# Altium PCB LCD_Board_2.PcbDoc (part 2 of 2)
Units mm, origin at the board's own origin, x right, y up, seen from the top; angles counter-clockwise.
Board outline 96.52 x 66.04 mm, 2 copper layers (Top Layer, Bottom Layer), stack 1.569 mm thick; 78 components, 60 nets, 337 pads, 81 vias.
Unrouted connection lines stored in the file: 77.
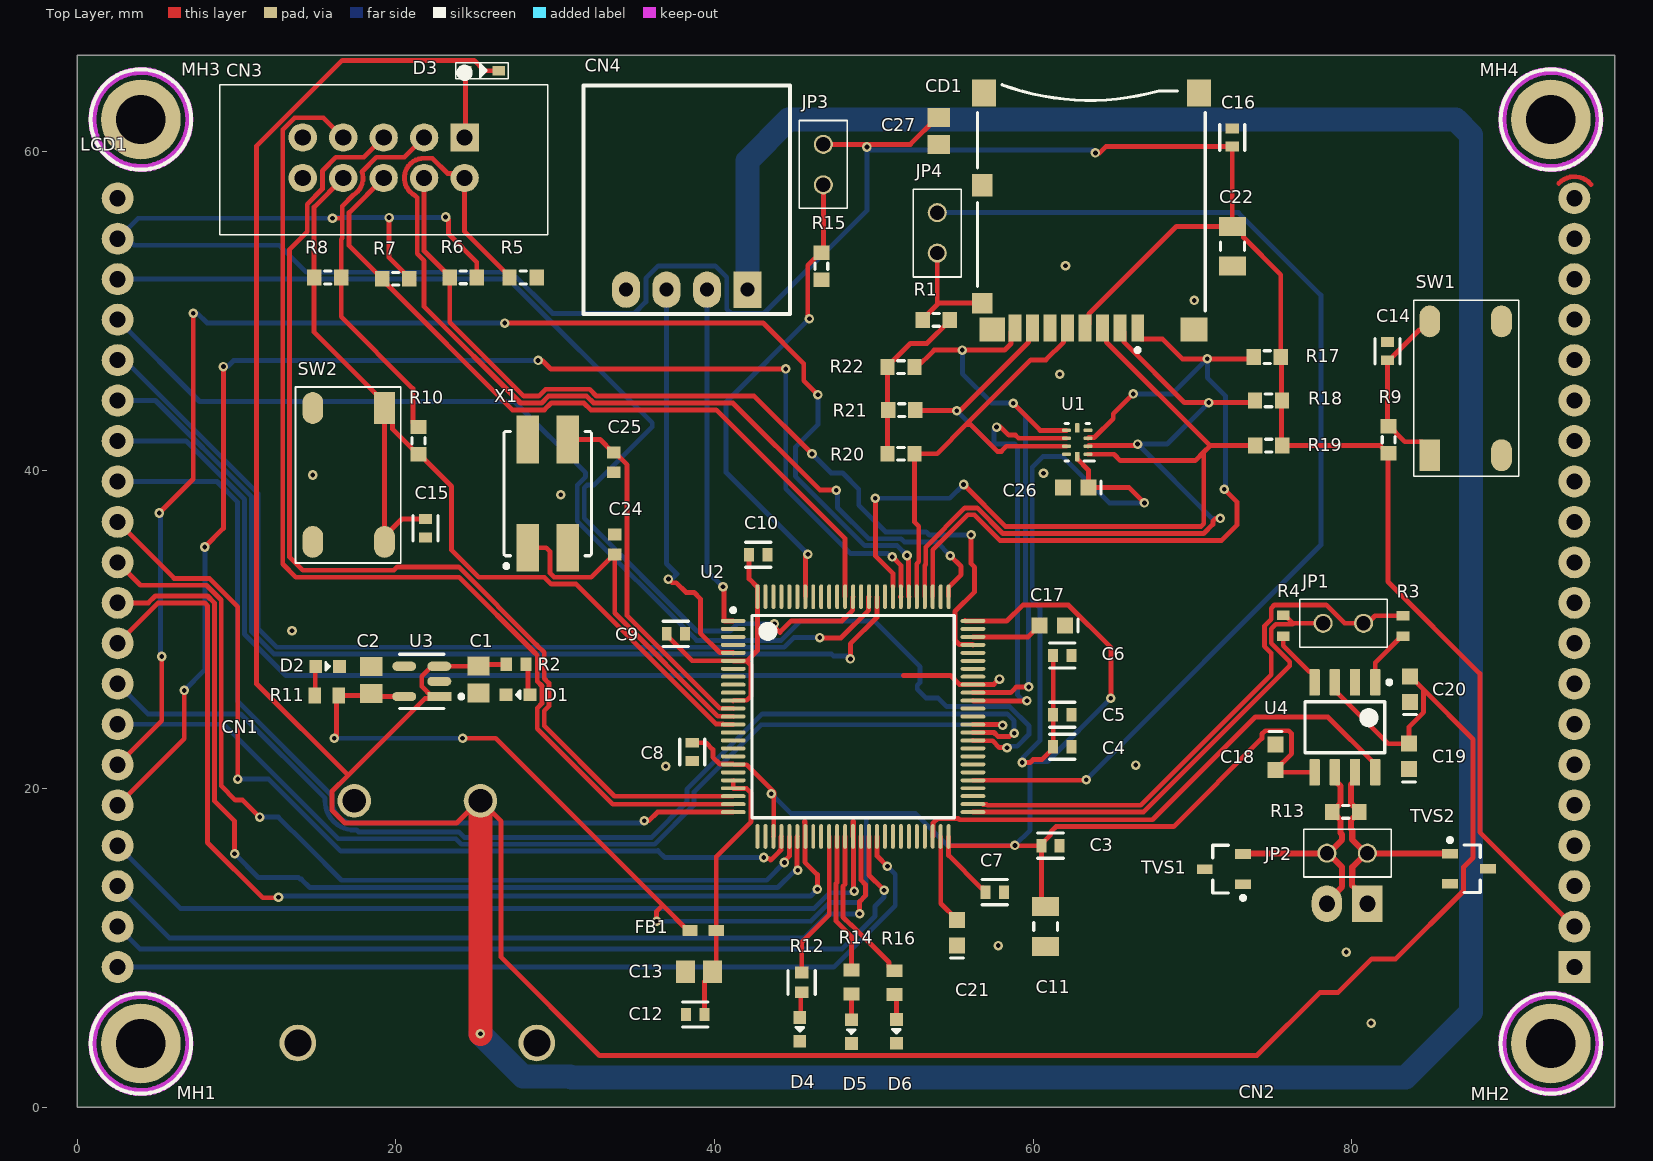
[diagram p0: Top Layer view]

## Via types
v1: diameter 0.6, hole 0.3, Top Layer to Bottom Layer, 81 vias

## Nets (pads, with @x,y where several pads share a name; then routed paths per layer and width w, separated by ;. In a path a pad name is that pad's centre, name@x,y a point inside that pad or via, vN(x,y) a via of type N, cw(c..) or ccw(c..) an arc to the next point about the centre after c; other vN are vias at no path point) (continued)
NetLCD1_24: (continued)
  Bottom Layer w0.305: LCD1.24 7.679,44.302 27.444,44.302 31.916,39.83 31.916,39.577 31.394,39.055 31.394,36.795 38.883,29.306 44.196,29.306 45.415,30.525 50.032,30.525 52.908,27.649 52.908,26.67 52.73,26.492 52.73,26.239 53.289,25.68 54.051,25.68 54.585,25.146 58.536,25.146 59.746,23.936 59.746,23.803 59.745,23.802 59.745,23.54 59.746,23.539 59.746,23.406 58.999,22.659 58.342,22.659 58.365,22.636 v1(58.365,22.572)
NetLCD1_25: LCD1.25 U2.86 | length 61.4
  Top Layer w0.305: v1(46.609,29.484) 46.629,29.464 47.945,29.464 49.682,31.201 49.682,32.026 U2.86
  Bottom Layer w0.305: LCD1.25 2.989,46.901 11.367,38.523 11.367,30.048 12.541,28.874 44.375,28.874 44.984,29.484 v1(46.609,29.484)
NetLCD1_26: LCD1.26 U2.85 | length 62.3
  Top Layer w0.305: v1(48.539,28.143) 48.539,29.083 50.205,30.748 U2.85
  Bottom Layer w0.305: LCD1.26 4.918,44.361 10.935,38.344 10.935,29.869 12.362,28.442 47.351,28.442 47.466,28.328 48.355,28.328 v1(48.539,28.143)
NetLCD1_27: LCD1.27 U2.67 | length 66.8
  Top Layer w0.305: 51.867,27.102 54.826,27.102 55.382,26.546 56.207,26.546 U2.67 56.252,26.546 57.542,26.546 v1@57.913,26.918
  Bottom Layer w0.305: LCD1.27 6.847,41.821 10.503,38.165 10.503,29.69 13.092,27.102 51.867,27.102
  other v1: 57.897,26.877
NetLCD1_28: LCD1.28 U2.25 | length 55.5
  Top Layer w0.305: v1(35.596,17.982) 35.602,17.988 35.89,17.988 36.426,18.524 U2.25
  Bottom Layer w0.305: LCD1.28 8.776,39.281 10.071,37.986 10.071,25.49 15.992,19.569 15.992,19.259 ccw(c17.394,19.238) 17.397,17.835 17.601,17.835 25.314,17.835 35.449,17.835 35.539,17.925 v1(35.596,17.982)
NetLCD1_29: LCD1.29 U2.29 | length 57.9
  Top Layer w0.305: LCD1.29 6.084,33.197 8.297,33.197 10.085,31.41 v1(10.085,20.6) ; v1(43.101,15.678) 43.158,15.621 43.41,15.621 43.531,15.5 43.902,15.871 44.182,16.151 44.182,16.976 U2.29
  Bottom Layer w0.305: v1(10.085,20.6) 12.024,20.6 16.547,16.077 36.473,16.077 ; 36.453,16.106 36.477,16.082 36.881,15.678 v1(43.101,15.678)
NetLCD1_30: LCD1.30 U2.30 | length 59.2
  Top Layer w0.305: LCD1.30 3.976,32.765 8.118,32.765 9.043,31.84 9.043,20.169 9.929,19.283 10.397,19.283 v1(11.468,18.212) ; v1(44.393,15.364) 44.393,15.443 44.705,15.755 U2.30
  Bottom Layer w0.305: v1(11.468,18.212) 12.634,18.212 14.412,16.434 16.594,14.252 39.892,14.252 43.282,14.252 v1(44.393,15.364)
NetLCD1_31: LCD1.31 U2.31 | length 61.3
  Top Layer w0.305: LCD1.31 4.469,31.661 4.901,32.093 8.179,32.093 8.611,31.661 8.611,19.227 9.881,17.958 v1(9.881,15.913) ; v1@45.182,14.904 45.182,16.976 U2.31
  Bottom Layer w0.305: v1(9.881,15.913) 11.38,14.413 13.906,14.413 13.997,14.322 14.071,14.322 14.601,13.792 43.971,13.792 45.069,14.889 v1@45.081,14.889
  other v1: 45.236,14.877
NetLCD1_32: LCD1.32 U2.32 | length 67.1
  Top Layer w0.305: LCD1.32 5.08,31.661 8,31.661 8.179,31.482 8.179,16.616 11.648,13.147 12.601,13.147 v1(12.639,13.186) ; U2.32 45.705,17.926 45.657,17.926 45.657,17.872 45.682,17.846 45.682,15.389 46.463,14.608 v1(46.463,13.686)
  Bottom Layer w0.305: v1(12.639,13.186) 12.695,13.242 12.904,13.242 12.925,13.263 46.04,13.263 v1(46.463,13.686)
NetLCD1_33: LCD1.33 U2.61 | length 68.1
  Top Layer w0.305: U2.61 57.549,23.524 57.794,23.279 58.539,23.279 58.778,23.518 v1@58.827,23.518
  Bottom Layer w0.305: LCD1.33 4.338,24.783 4.427,24.694 10.257,24.694 10.346,24.604 15.56,19.39 15.56,19.265 cw(c15.255,19.264) 15.56,19.26 ccw(c17.394,19.238) 17.417,17.403 cw(c17.421,17.098) 17.422,17.403 17.547,17.403 17.665,17.285 23.952,17.285 24.297,16.941 36.055,16.941 38.277,19.163 38.277,19.965 43.006,24.694 58.377,24.694 58.815,24.256 v1(58.815,23.475)
NetLCD1_34: LCD1.34 U2.62 | length 64.1
  Top Layer w0.305: U2.62 58.048,24.024 v1(58.086,23.985)
  Bottom Layer w0.305: LCD1.34 9.193,24.041 16.381,16.853 23.773,16.853 24.118,16.509 36.245,16.509 38.709,18.973 38.709,19.786 42.93,24.007 58.064,24.007 v1(58.086,23.985)
NetLCD1_35: LCD1.35 U2.81 | length 89.8
  Top Layer w0.305: LCD1.35 5.309,24.27 v1(5.309,28.296) ; v1(5.156,37.3) 7.29,39.433 v1(7.29,49.835) ; v1(26.835,49.225) 43.065,49.225 45.608,46.682 45.608,45.616 v1(46.495,44.729) ; v1(52.09,34.635) 52.09,34.558 52.182,34.465 52.182,32.071 U2.81
  Bottom Layer w0.305: v1(5.156,37.3) 5.232,37.224 5.232,28.372 v1(5.309,28.296) ; v1(7.29,49.835) 7.551,49.835 8.161,49.225 v1(26.835,49.225) ; v1(46.495,44.729) 46.495,42.85 45.085,41.44 45.085,39.614 49.446,35.253 51.471,35.253 v1(52.09,34.635)
NetLCD1_36: LCD1.36 U2.82 | length 84.1
  Top Layer w0.305: LCD1.36 6.718,23.139 v1(6.718,26.162) ; v1(8.014,35.166) 9.182,36.335 v1(9.182,46.495) ; v1(28.931,46.876) 29.192,46.876 29.725,46.342 v1(44.475,46.342) ; v1(51.164,34.546) 51.179,34.546 51.705,34.02 U2.82@51.705,32.671 ; U2.82@51.682,32.026 U2.82
  Bottom Layer w0.305: v1(6.718,26.162) 8.014,27.457 v1(8.014,35.166) ; v1(9.182,46.495) 9.443,46.495 9.824,46.876 v1(28.931,46.876) ; v1(44.475,46.342) 44.475,38.826 48.536,34.766 50.864,34.766 51.085,34.546 v1(51.164,34.546)
NetLCD1_37: LCD1.37 U2.38 | length 53.6
  Top Layer w0.305: U2.38 48.704,17.926 48.727,17.926 48.727,16.999 48.727,13.616 v1(48.774,13.569)
  Bottom Layer w0.305: LCD1.37 6.482,12.479 46.256,12.479 47.242,13.465 48.671,13.465 v1(48.774,13.569)
NetLCD1_38: LCD1.38 U2.39 | length 53.6
  Top Layer w0.305: v1@49.082,12.187 49.115,12.22 49.115,12.91 49.481,13.276 49.481,13.982 49.205,14.258 U2.39
  Bottom Layer w0.305: LCD1.38 5.791,10.63 45.628,10.63 47.138,12.14 v1(49.115,12.14)
NetLCD1_39: LCD1.39 U2.40 | length 54.6
  Top Layer w0.305: U2.40 49.705,14.569 50.599,13.674 v1@50.641,13.674
  Bottom Layer w0.305: LCD1.39 3.937,9.944 48.027,9.944 50.081,11.998 ; 50.063,11.98 50.081,11.998 ; v1(50.648,13.626) 50.648,13.188 50.081,12.621 50.081,11.998
NetLCD1_40: LCD1.40 U2.41 | length 55.2
  Top Layer w0.305: U2.41 50.205,15.777 v1(50.857,15.124)
  Bottom Layer w0.305: LCD1.40 47.495,8.801 51.354,12.66 51.354,14.627 v1(50.857,15.124)
NetR3_2: R3.2 U4.1 | length 3.7
  Top Layer w0.305: U4.1 81.483,27.912 83.123,29.551 R3.2
NetR4_2: R4.2 U4.4 | length 3.8
  Top Layer w0.305: R4.2@75.805,29.577 R4.2 75.705,28.98 77.336,27.348 77.501,27.348 77.64,27.209 77.64,27.044 U4.4@77.813,26.872
NetU2_48: U2.48 U4.8 | length 33.2
  Top Layer w0.305: U2.48 53.727,17.021 53.727,17.846 54.007,18.126 55.302,18.126 55.382,18.046 67.5,18.046 73.952,24.498 78.511,24.498 81.483,21.526 U4.8
NRST: C15.2 CN3.9 R8.1 R10.1 SW2.1 SW2.2 U2.14 | length 61.7
  Top Layer w0.305: CN3.9 14.874,56.504 R8.1 14.874,48.656 19.54,43.989 SW2.1@19.54,43.639 ; SW2.2 SW2.2@19.291,35.838 ; C15.2 20.379,36.926 SW2.2@19.291,35.838 ; U2.14 40.58,24.024 40.557,24.046 40.11,24.046 31.318,32.838 29.76,32.838 29.328,33.27 25.206,33.27 23.505,34.972 23.505,38.966 21.773,40.698 21.475,40.996 21.375,40.996 19.789,42.582 19.789,43.39 SW2.1@19.54,43.639 ; SW2.2@19.291,35.838 SW2.1 SW2.1@19.54,43.639
OSC_IN: C25.2 U2.12 X1.3 | length 22.9
  Top Layer w0.305: X1.3 32.818,41.923 33.63,41.11 C25.2 33.73,41.11 34.521,40.319 34.521,30.857 40.332,25.046 41.157,25.046 U2.12
OSC_OUT: C24.2 U2.13 X1.1 | length 21.4
  Top Layer w0.305: X1.1 29.442,35.123 29.69,34.874 29.69,33.519 29.939,33.27 32.273,33.27 33.694,34.691 C24.2 33.744,31.024 40.221,24.546 41.157,24.546 U2.13
SWCLK: CN3.6 R5.1 U2.76 | length 64.6
  Top Layer w0.305: R5.1 27.142,52.133 24.32,54.954 CN3.6 24.039,58.613 23.254,58.613 22.295,59.572 21.78,59.572 ccw(c21.78,58.331) 21.226,57.22 21.259,57.188 cw(c21.044,56.972) 21.26,57.186 21.349,57.098 21.349,53.57 21.78,53.139 21.78,50.253 21.87,50.164 27.827,44.207 29.149,44.207 29.581,44.639 31.988,44.639 32.42,44.207 41.161,44.207 46.634,38.734 v1(47.65,38.734) ; U2.76 54.705,32.644 55.486,33.426 55.486,33.943 v1(54.806,34.623)
  Bottom Layer w0.305: v1(47.65,38.734) 47.726,38.658 47.726,37.642 49.683,35.685 51.714,35.685 51.915,35.484 53.946,35.484 v1(54.806,34.623)
SWDIO: CN3.7 R6.1 U2.72 | length 57.4
  Top Layer w0.305: CN3.7 21.78,53.749 23.384,52.145 23.384,49.286 28.032,44.639 28.97,44.639 29.402,45.07 32.167,45.07 32.599,44.639 42.496,44.639 v1(46.126,41.008) ; v1(56.112,35.922) 56.112,34.114 56.33,33.896 56.33,32.35 55.102,31.121 55.102,29.326 55.382,29.046 56.207,29.046 U2.72
  Bottom Layer w0.305: v1(46.126,41.008) 47.324,39.811 48.047,39.811 49.06,38.798 49.06,37.796 50.739,36.117 53.289,36.117 53.483,35.922 v1(56.112,35.922)
SWO: CN3.8 R7.1 U2.89 | length 47.9
  Top Layer w0.305: R7.1@19.141,51.957 27.322,43.775 29.328,43.775 29.76,44.207 31.81,44.207 32.241,43.775 40.12,43.775 48.205,35.691 U2.89 ; R7.1 17.069,54.078 17.069,56.159 CN3.8
UART_RX: CN3.4 U2.24 | length 69.4
  Top Layer w0.305: CN3.4 15.459,62.112 13.646,62.112 12.903,61.369 12.903,34.098 13.729,33.272 23.983,33.272 28.677,28.578 28.884,28.371 28.884,26.733 29.176,26.441 29.176,25.349 28.884,25.057 28.884,23.757 33.617,19.024 U2.24
UART_TX: CN3.3 U2.23 | length 67
  Top Layer w0.305: CN3.3 17.999,59.63 16.243,59.63 15.402,58.788 15.402,57.643 14.442,56.683 14.442,54.967 13.335,53.861 13.335,34.53 14.161,33.704 19.885,33.704 20.101,33.92 23.946,33.92 28.856,29.01 29.316,28.55 29.316,26.912 29.608,26.62 29.608,25.17 29.316,24.878 29.316,23.936 33.727,19.524 U2.23
"VCAP 1": C21.2 U2.49 | length 5.7
  Top Layer w0.305: U2.49 54.205,12.788 C21.2
"VCAP 2": C17.2 U2.73 | length 4.5
  Top Layer w0.305: U2.73 59.699,29.524 C17.2
pads on no net: CN1.3 CN1.4 LCD1.3 LCD1.4 LCD1.5 LCD1.6 LCD1.7 LCD1.8 LCD1.9 LCD1.10 LCD1.11 LCD1.12 LCD1.13 LCD1.14 LCD1.15 LCD1.16 LCD1.17 LCD1.18 LCD1.19 LCD1.20 MH1.1 MH2.1 MH3.1 MH4.1 TVS1.3 TVS2.3 U1.4 U1.9 U2.2 U2.3 U2.4 U2.7 U2.8 U2.9 U2.15 U2.16 U2.17 U2.18 U2.26 U2.33 U2.34 U2.42 U2.43 U2.44 U2.45 U2.46 U2.47 U2.53 U2.54 U2.56 U2.57 U2.58 U2.59 U2.63 U2.64 U2.68 U2.69 U2.70 U2.71 U2.77 U2.84 U2.87 U2.90 U2.91 U2.92 U2.93 U2.95 U2.96 U2.97 U2.98 U3.4
copper on no net: | length 0.9
  Top Layer w0.305: 27.991,3.848 28.18,4.038 28.854,4.038

## Text inside footprints (layer, text, board x,y; h text height)
FB1: Mechanical 6 "Land Pattern Adapted for Flow Soldering" at 38.291,11.687 h0.05